# EAGLE board Syn-ArduinoShield-v1a (EAGLE 5.10)
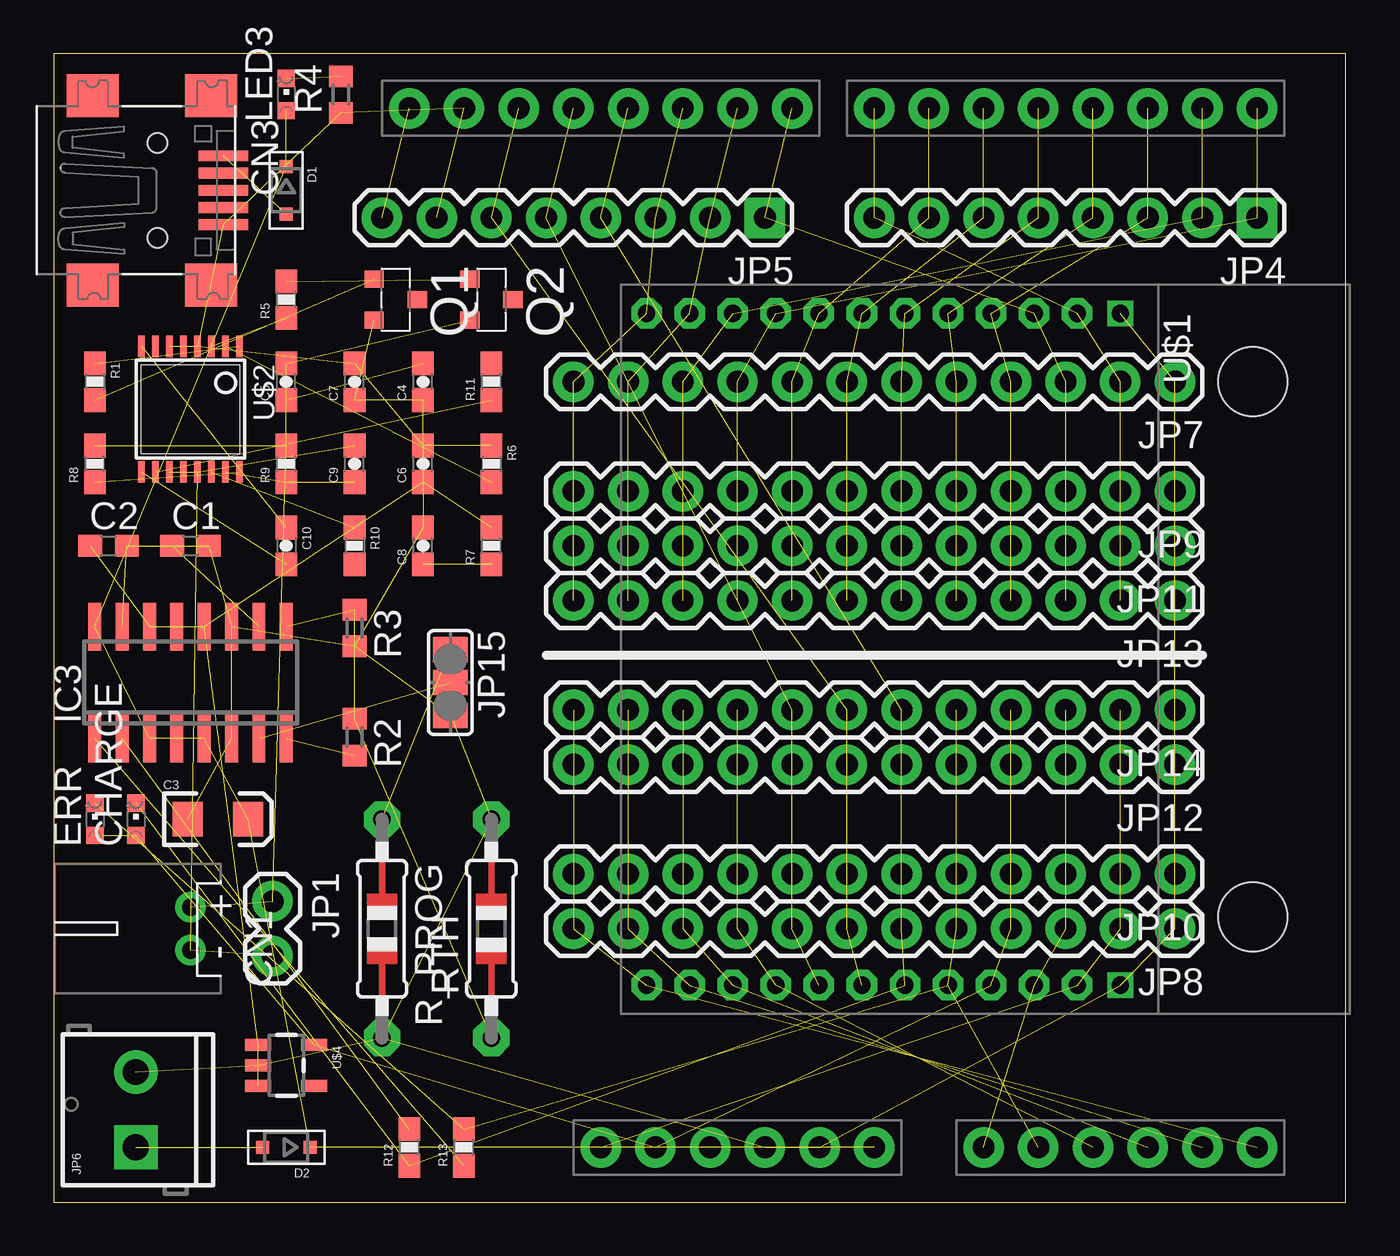
[diagram p0: board, top side]
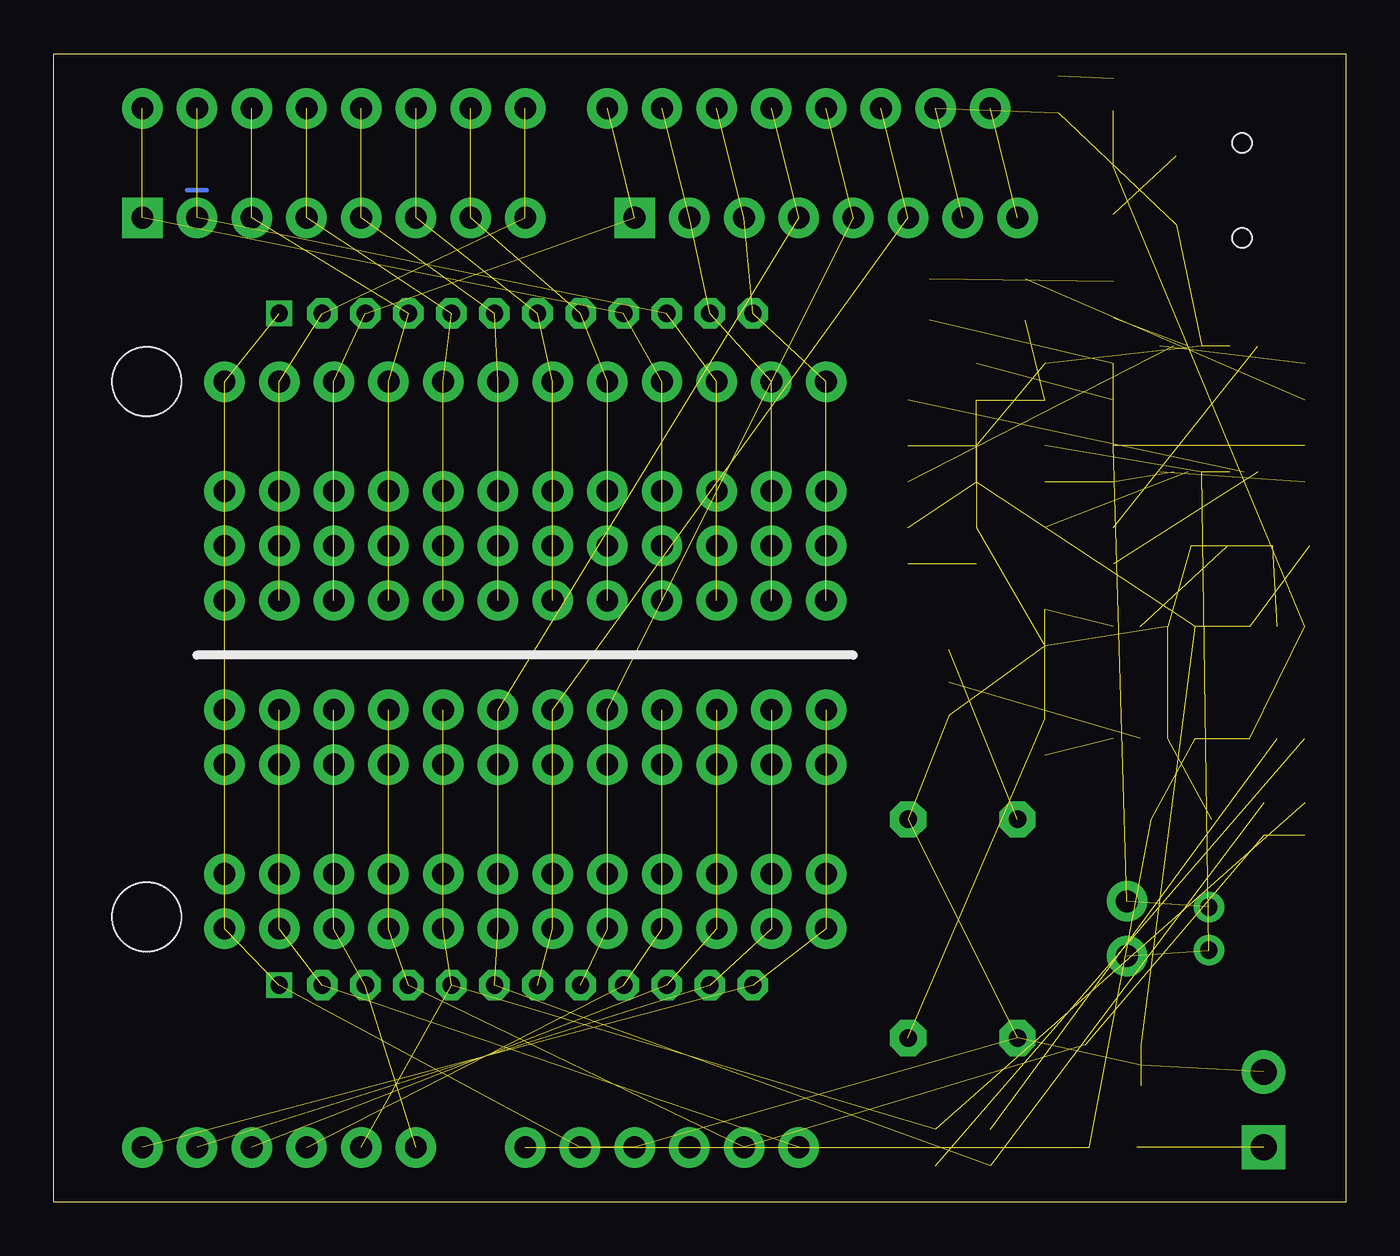
[diagram p1: board, bottom side, seen from below]

Size 59.99 x 53.33 mm. Coordinates in mm from the lower left corner, seen from the top.
Outline: 0,0 59.99,0 59.99,53.33 0,53.33 0,0
Copper layers (1*16): Top 0.0356mm / dielectric 1.5011mm / Bottom 0.0356mm
Design rules "LaenPCBOrder": minimum track width 6mil, minimum drill 13mil, track to track 6mil, track to pad 6mil, pad to pad 6mil, via to via 6mil, smd to smd 6mil, copper to edge 15mil, drill to drill 6mil, minimum pad ring 7mil, minimum via ring 7mil, stop-mask expansion 4mil, vias tented up to drill 0mil, thermal gap 10mil

## Footprints (pad centres in the part's own frame; a part is rotated, then mirrored left to right if it is on the bottom)
C0603 = smd 1.1 x 1: 1 -0.85,0; 2 0.85,0
EIA3216 = smd 1.4 x 1.6: A 1.4,0; C -1.4,0
0603-CAP = smd 1.1 x 1: 1 -0.85,0; 2 0.85,0
CHIPLED_0603 = smd 0.8 x 0.8: A 0,-0.75; C 0,0.75
JST-PH-2-THM-RA = drill 0.8 pad 1.422 round: 1 1,0; 2 -1,0
USB-MINIB = smd 0.5 x 2.308: D+ 0,4.064; D- -0.8,4.064; GND 1.6,4.064; ID 0.8,4.064; VBUS -1.6,4.064 | smd 2 x 2.4: GND1 -4.4,-2; GND2 -4.4,3.5; GND3 4.4,3.5; GND4 4.4,-2 | hole 0.9: -2.2,1; 2.2,1
SOD-323 = smd 0.6 x 0.6: A 1.1,0; C -1.1,0
SO16 = smd 0.6 x 2.2: 1 -4.445,-2.6; 2 -3.175,-2.6; 3 -1.905,-2.6; 4 -0.635,-2.6; 5 0.635,-2.6; 6 1.905,-2.6; 7 3.175,-2.6; 8 4.445,-2.6; 9 4.445,2.6; 10 3.175,2.6; 11 1.905,2.6; 12 0.635,2.6; 13 -0.635,2.6; 14 -1.905,2.6; 15 -3.175,2.6; 16 -4.445,2.6
1X02 = drill 1.016 pad 1.88 round: 1 0,0; 2 2.54,0
1X08 = drill 1.016 pad 1.88 square: 1 0,0 | drill 1.016 pad 1.88 round: 2 2.54,0; 3 5.08,0; 4 7.62,0; 5 10.16,0; 6 12.7,0; 7 15.24,0; 8 17.78,0
SCREWTERMINAL-3.5MM-2 = drill 1.2 pad 2.032 square: 1 0,0 | drill 1.2 pad 2.032 round: 2 3.5,0
1X12 = drill 1.016 pad 1.88 round: 1 0,0; 2 2.54,0; 3 5.08,0; 4 7.62,0; 5 10.16,0; 6 12.7,0; 7 15.24,0; 8 17.78,0; 9 20.32,0; 10 22.86,0; 11 25.4,0; 12 27.94,0
SJ_2 = smd 1.168 x 1.6: 1 -1.524,0; 2 0,0; 3 1.524,0
MICRO3 = smd 0.8 x 0.9: 1 -0.95,-1; 2 0.95,-1; 3 0,1
0603-RES = smd 1.1 x 1: 1 -0.85,0; 2 0.85,0
R0603 = smd 1 x 1.1: 1 -0.85,0; 2 0.85,0
0805-THM = drill 0.813 pad 1.676 octagon: 1 -5.08,0; 2 5.08,0
DUEMILANOVE_VIAS = drill 1.016 pad 1.88 round: 3.3V 50.8,13.97; 5V 50.8,16.51; A0 50.8,29.21; A1 50.8,31.75; A2 50.8,34.29; A3 50.8,36.83; A4 50.8,39.37; A5 50.8,41.91; AREF 2.54,2.54; D2 2.54,36.83; D3 2.54,34.29; D4 2.54,31.75; D5 2.54,29.21; D6 2.54,26.67; D7 2.54,24.13; D8 2.54,20.32; D9 2.54,17.78; D10 2.54,15.24; D11 2.54,12.7; D12 2.54,10.16; D13 2.54,7.62; GND@0 50.8,19.05; GND@1 50.8,21.59; GND@2 2.54,5.08; RES 50.8,11.43; RX 2.54,41.91; TX 2.54,39.37; VIN 50.8,24.13
SYNAPSERF100 = drill 0.8 square: 1 0,0; 24 31.2,0 | drill 0.8 pad 1.422 octagon: 2 0,-2; 3 0,-4; 4 0,-6; 5 0,-8; 6 0,-10; 7 0,-12; 8 0,-14; 9 0,-16; 10 0,-18; 11 0,-20; 12 0,-22; 13 31.2,-22; 14 31.2,-20; 15 31.2,-18; 16 31.2,-16; 17 31.2,-14; 18 31.2,-12; 19 31.2,-10; 20 31.2,-8; 21 31.2,-6; 22 31.2,-4; 23 31.2,-2 | hole 3.2: 3.17,6.16; 28.03,6.16
DS2764 = smd 0.305 x 0.991: CC -2.275,-2.918; DC -0.975,-2.918; IS1 2.275,2.918; IS2 2.275,-2.918; PLS -1.625,-2.918; PS 1.625,-2.918; SCL -0.975,2.918; SDA 1.625,2.918; SNS -0.325,-2.918; SNS1 0.325,-2.918; SNS2 0.975,-2.918; VDD -1.625,2.918; VIN -2.275,2.918; VSS -0.325,2.918; VSS1 0.325,2.918; VSS2 0.975,2.918
SOT23-5 = smd 0.55 x 1.2: 1 -0.95,-1.3; 2 0,-1.3; 3 0.95,-1.3; 4 0.95,1.3; 5 -0.95,1.3

## Placement (x,y rotation side)
C1  0.47uF  [C0603]  6.35,30.48 0 top
C2  10uF  [C0603]  2.54,30.48 0 top
C3  10uF  [EIA3216]  7.62,17.78 0 top
C4  1000pF  [0603-CAP]  17.14,38.1 90 top
C5  1000pF  [0603-CAP]  10.79,38.1 90 top
C6  1000pF  [0603-CAP]  17.14,34.29 90 top
C7  1uF  [0603-CAP]  13.97,38.1 90 top
C8  4.7uF  [0603-CAP]  17.14,30.48 90 top
C9  0.1uF  [0603-CAP]  13.97,34.29 90 top
C10  0.1uF  [0603-CAP]  10.79,30.48 270 top
CHARGE  ORG  [CHIPLED_0603]  3.81,17.78 0 top
CN1  [JST-PH-2-THM-RA]  6.35,12.7 90 top
CN3  [USB-MINIB]  3.81,46.99 270 top
D1  [SOD-323]  10.79,46.99 270 top
D2  [SOD-323]  10.79,2.54 180 top
ERR  RED  [CHIPLED_0603]  1.91,17.78 0 top
IC3  [SO16]  6.35,24.13 0 top
JP1  [1X02]  10.16,13.97 270 top
JP4  [1X08]  55.88,45.72 180 top
JP5  [1X08]  33.02,45.72 180 top
JP6  [SCREWTERMINAL-3.5MM-2]  3.81,2.54 90 top
JP7  M12PTH  [1X12]  52.07,38.1 180 top
JP8  M12PTH  [1X12]  52.07,12.7 180 top
JP9  M12PTH  [1X12]  52.07,33.02 180 top
JP10  M12PTH  [1X12]  52.07,15.24 180 top
JP11  M12PTH  [1X12]  52.07,30.48 180 top
JP12  M12PTH  [1X12]  52.07,20.32 180 top
JP13  M12PTH  [1X12]  52.07,27.94 180 top
JP14  M12PTH  [1X12]  52.07,22.86 180 top
JP15  [SJ_2]  18.41,24.13 270 top
LED3  [CHIPLED_0603]  10.79,51.44 0 top
Q1  IRLML6401  [MICRO3]  15.88,41.91 270 top
Q2  IRLML6401  [MICRO3]  20.32,41.91 270 top
R1  1K  [0603-RES]  1.91,38.1 270 top
R2  6.19K  [R0603]  13.97,21.59 270 top
R3  7.3K  [R0603]  13.97,26.67 270 top
R4  1K  [R0603]  13.34,51.44 90 top
R5  1K  [0603-RES]  10.79,41.91 90 top
R6  150  [0603-RES]  20.32,34.29 270 top
R7  1  [0603-RES]  20.32,30.48 90 top
R8  [0603-RES]  1.91,34.29 90 top
R9  [0603-RES]  10.79,34.29 90 top
R10  150  [0603-RES]  13.97,30.48 270 top
R11  150  [0603-RES]  20.32,38.1 90 top
R12  330  [0603-RES]  16.51,2.54 90 top
R13  330  [0603-RES]  19.05,2.54 90 top
R_PROG  [0805-THM]  15.24,12.7 270 top
RTH  10K @ 25degC  [0805-THM]  20.32,12.7 90 top
U1  ARDUINO_SHIELDNO_SILK  [DUEMILANOVE_VIAS]  13.97,53.34 270 top
U$1  SYNAPSEWIRELESS-RFENGINESTD  [SYNAPSERF100]  49.53,41.27 270 top
U$2  DS2764  [DS2764]  6.35,36.83 180 top
U$4  MCP1802  [SOT23-5]  10.79,6.35 270 top

## Library data of the parts
C1 C2 CHARGE CN1 CN3 D1 D2 ERR IC3 LED3 R2-R4 R_PROG RTH = adafruit
C3-C10 JP1 JP4-JP15 R1 R5-R13 U1 = SparkFun
Q1 Q2 = transistor-power
U$1 = 0_jc-custom
U$2 = ssozonoff
U$4 = 0_jc-modified

## Nets
ADC0: JP8.3 JP10.3 JP12.3 JP14.3 U1.A0 U$1.22
ADC1: ERR.C JP8.5 JP10.5 JP12.5 JP14.5 R13.2 U1.A1 U$1.20
ADC2: JP8.9 JP10.9 JP12.9 JP14.9 U1.A2 U$1.16
ADC3: JP8.10 JP10.10 JP12.10 JP14.10 U1.A3 U$1.15
ADC4: JP8.11 JP10.11 JP12.11 JP14.11 U1.A4 U$1.14
ADC5: JP8.12 JP10.12 JP12.12 JP14.12 U1.A5 U$1.13
AREF: JP5.8 U1.AREF
ARX: JP4.1 JP7.9 JP9.9 JP11.9 JP13.9 U1.RX U$1.9
ATX: JP4.2 JP7.10 JP9.10 JP11.10 JP13.10 U1.TX U$1.10
BAT+: C5.2 CN1.1 JP1.1 Q2.2 R8.2 R9.2
BAT-: C9.2 CN1.2 JP1.2 U$2.VSS U$2.VSS1 U$2.VSS2
D2: JP4.3 JP7.4 JP9.4 JP11.4 JP13.4 U1.D2 U$1.4
D3: JP4.4 JP7.5 JP9.5 JP11.5 JP13.5 U1.D3 U$1.5
D4: JP4.5 JP7.6 JP9.6 JP11.6 JP13.6 U1.D4 U$1.6
D5: JP4.6 JP7.7 JP9.7 JP11.7 JP13.7 U1.D5 U$1.7
D6: JP4.7 JP7.8 JP9.8 JP11.8 JP13.8 U1.D6 U$1.8
D7: JP4.8 JP7.2 JP9.2 JP11.2 JP13.2 U1.D7 U$1.2
D8: JP5.1 JP7.3 JP9.3 JP11.3 JP13.3 U1.D8 U$1.3
D9: JP5.2 JP7.11 JP9.11 JP11.11 JP13.11 U1.D9 U$1.11
D10: JP5.3 JP7.12 JP9.12 JP11.12 JP13.12 U1.D10 U$1.12
D11: CHARGE.C JP5.4 JP8.6 JP10.6 JP12.6 JP14.6 R12.1 U1.D11 U$1.19
D12: JP5.5 JP8.8 JP10.8 JP12.8 JP14.8 U1.D12 U$1.17
D13: JP5.6 JP8.7 JP10.7 JP12.7 JP14.7 U1.D13 U$1.18
GND: C1.2 C2.2 C3.C C6.2 C7.2 C8.2 CN3.GND IC3.6 IC3.11 IC3.15 JP5.7 JP6.2 JP7.1 JP8.1 JP9.1 JP10.1 JP11.1 JP12.1 JP13.1 JP14.1 JP15.3 R3.2 R4.1 R6.1 R_PROG.2 RTH.2 U1.GND@0 U1.GND@1 U1.GND@2 U$1.1 U$1.24 U$2.SNS U$2.SNS1 U$2.SNS2 U$4.2
I2C_SCL: R10.2
I2C_SDA: R11.2
MPROG: IC3.7 JP15.2
N$1: IC3.1 R13.1
N$2: LED3.C R4.2
N$3: Q1.1 R1.2
N$4: Q2.1 R5.2
N$5: IC3.2 R12.2
N$6: R11.1 U$2.SDA
N$7: IC3.8 R2.2
N$8: IC3.9 R2.1 R3.1 RTH.1
N$9: C1.1 IC3.10
N$10: C4.2 C5.1
N$11: JP15.1 R_PROG.1
N$12: R1.1 U$2.CC
N$13: R6.2 U$2.PLS
N$14: R5.1 U$2.DC
N$15: C8.1 R7.1
N$16: R8.1 U$2.VIN
N$17: C9.1 R9.1 U$2.VDD
N$19: C10.1 U$2.IS2
N$20: R10.1 U$2.SCL
N$21: CN3.VBUS D1.A
N$22: C10.2 U$2.IS1
N$55: U1.5V
POWER_SWITCH: U$2.PS
RESET: JP8.2 JP10.2 JP12.2 JP14.2 U1.RES U$1.23
VBAT+: C2.1 C4.1 C6.1 C7.1 IC3.12 IC3.13 IC3.14 Q1.2 R7.2 U$4.1 U$4.3
VCC3: CHARGE.A ERR.A JP8.4 JP10.4 JP12.4 JP14.4 U1.3.3V U$1.21 U$4.5
VIN: C3.A D1.C D2.C IC3.3 IC3.4 IC3.5 IC3.16 LED3.A U1.VIN
VINJ: D2.A JP6.1

## Tracks (layer width: path | path; a pad name or v marks a point on that pad's centre or on a via)
ADC0  (5 unrouted)
ADC1  (7 unrouted)
ADC2  (5 unrouted)
ADC3  (5 unrouted)
ADC4  (5 unrouted)
ADC5  (5 unrouted)
AREF  (1 unrouted)
ARX  (6 unrouted)
ATX  (6 unrouted)
BAT+  (5 unrouted)
BAT-  (5 unrouted)
D2  (6 unrouted)
D3  (6 unrouted)
D4  (6 unrouted)
D5  (6 unrouted)
D6  (6 unrouted)
D7  (6 unrouted)
D8  (6 unrouted)
D9  (6 unrouted)
D10  (6 unrouted)
D11  (8 unrouted)
D12  (6 unrouted)
D13  (6 unrouted)
GND  (34 unrouted)
MPROG  (1 unrouted)
N$1  (1 unrouted)
N$2  (1 unrouted)
N$3  (1 unrouted)
N$4  (1 unrouted)
N$5  (1 unrouted)
N$6  (1 unrouted)
N$7  (1 unrouted)
N$8  (3 unrouted)
N$9  (1 unrouted)
N$10  (1 unrouted)
N$11  (1 unrouted)
N$12  (1 unrouted)
N$13  (1 unrouted)
N$14  (1 unrouted)
N$15  (1 unrouted)
N$16  (1 unrouted)
N$17  (2 unrouted)
N$19  (1 unrouted)
N$20  (1 unrouted)
N$21  (1 unrouted)
N$22  (1 unrouted)
N$23
  Bottom 0.203: 52.89,46.99 53.79,46.99
RESET  (5 unrouted)
VBAT+  (10 unrouted)
VCC3  (8 unrouted)
VIN  (8 unrouted)
VINJ  (1 unrouted)